# Allegro board moto_io.brd
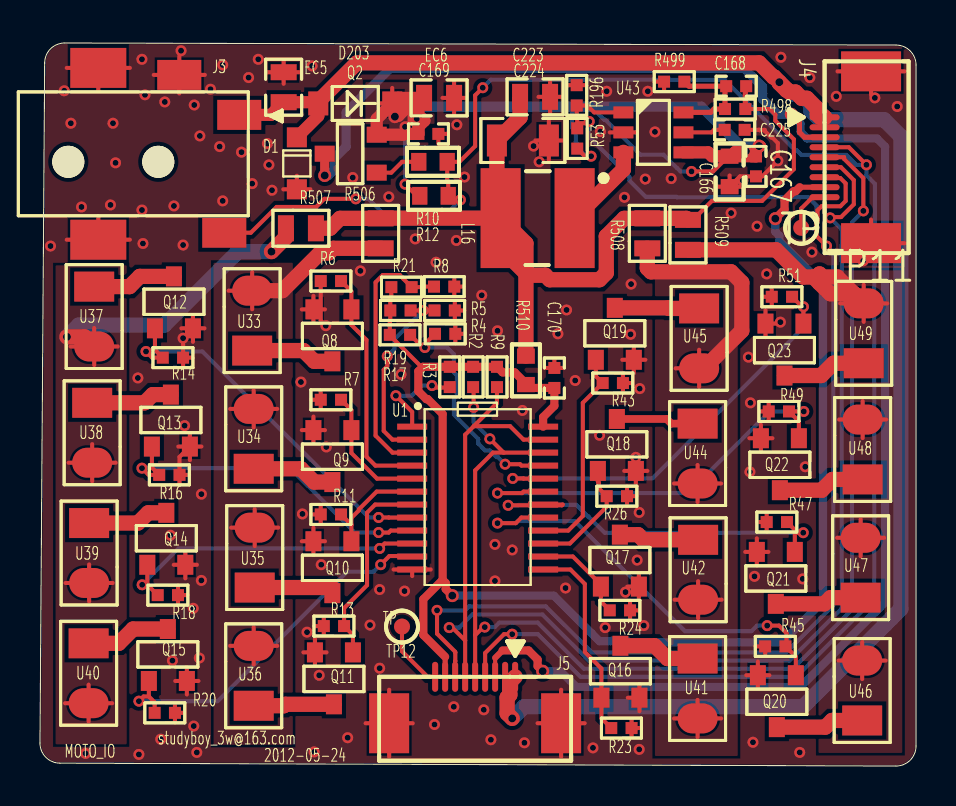
[diagram p0: board, top side]
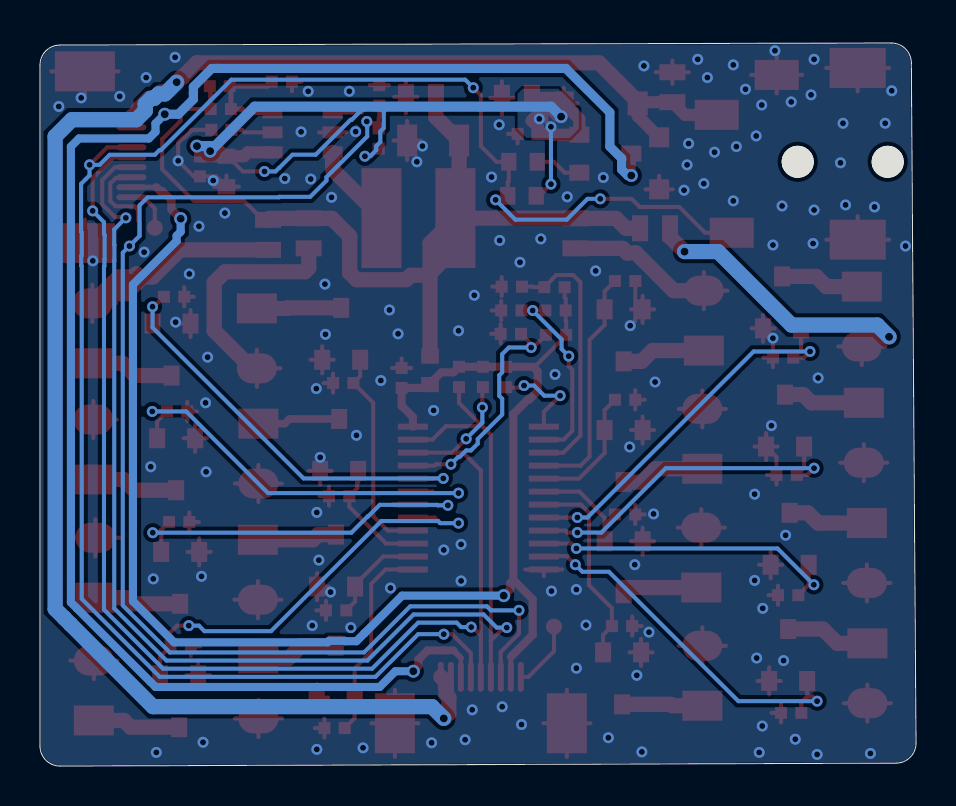
[diagram p1: board, bottom side, seen from below]

Outline 43.81 x 36.2 mm; copper layers: TOP, BOTTOM. Coordinates in mm from the lower left corner of the outline.
Outline path: 0,1.15 0.23,35.2 arc(0.53,35.91) 1.24,36.2 42.81,36.09 arc(43.52,35.8) 43.81,35.09 43.81,1 arc(43.51,0.29) 42.8,0 1,0.15 arc(0.29,0.44) 0,1.15

## Placement (name value [footprint] x y rotation side)
C166  4.7uF  [C0603]  34.49 29.77 270 top
C167  1uF  [C0402]  35.81 30.02 270 top
C168  10pF/NC  [C0402]  34.82 34.03 180 top
C169  1uF  [C0402]  19.42 31.64 0 top
C170  1uF  [C0402]  25.72 19.43 90 top
C223  22uF  [C0805]  24.76 33.5 0 top
C224  47uF  [C1206]  24.15 31.31 0 top
C225  1uF/NC  [C0402]  34.74 31.85 180 top
D1  MM3Z7V5  [SOD323]  12.85 30.17 90 top
D203  IN5819  [SOD123]  15.77 33.17 0 top
EC5  10uF  [C0805]  12.19 33.98 90 top
EC6  10uF  [C0805]  19.96 33.45 0 top
J3  DC JACK-111  [DC-PJK-111]  1.42 30.25 0 top
J4  CON8  [FCC9-0R5MM]  39.24 30.48 270 top
J5  CON8  [FCC9-0R5MM]  21.76 4.47 180 top
L16  2.2uH  [L4D18]  24.89 27.43 270 top
Q2  IRLML6401  [SOT-23]  15.54 30.65 90 top
Q8  KDT1304  [SOT-23]  14.62 21.56 180 top
Q9  KDT1304  [SOT-23]  14.62 15.52 180 top
Q10  KDT1304  [SOT-23]  14.62 9.95 180 top
Q11  KDT1304  [SOT-23]  14.7 4.39 180 top
Q12  KDT1304  [SOT-23]  6.7 23.21 0 top
Q13  KDT1304  [SOT-23]  6.55 17.29 0 top
Q14  KDT1304  [SOT-23]  6.32 11.38 0 top
Q15  KDT1304  [SOT-23]  6.39 5.56 0 top
Q16  KDT1304  [SOT-23]  29.03 4.72 0 top
Q17  KDT1304  [SOT-23]  29 10.28 0 top
Q18  KDT1304  [SOT-23]  28.85 16.07 0 top
Q19  KDT1304  [SOT-23]  28.75 21.64 0 top
Q20  KDT1304  [SOT-23]  36.85 3.25 180 top
Q21  KDT1304  [SOT-23]  36.8 9.42 180 top
Q22  KDT1304  [SOT-23]  37 15.11 180 top
Q23  KDT1304  [SOT-23]  37.23 20.85 180 top
R2  4.7K  [R0402]  21.66 19.48 270 top
R3  4.7K  [R0402]  20.49 19.48 270 top
R4  4.7K  [R0402]  20.26 21.64 0 top
R5  4.7K  [R0402]  20.24 22.81 0 top
R6  4.7K  [R0402]  14.55 24.28 180 top
R7  4.7K  [R0402]  14.55 18.34 180 top
R8  4.7K  [R0402]  20.21 24 0 top
R9  4.7K  [R0402]  22.85 19.48 270 top
R10  4.7K  [R0603]  19.65 30.25 0 top
R11  4.7K  [R0402]  14.55 12.59 180 top
R12  510K  [R0603]  19.7 28.55 180 top
R13  4.7K  [R0402]  14.7 7.01 180 top
R14  4.7K  [R0402]  6.65 20.44 0 top
R16  4.7K  [R0402]  6.47 14.58 0 top
R17  4.7K/NC  [R0402]  18 21.59 180 top
R18  4.7K  [R0402]  6.39 8.56 0 top
R19  4.7K/NC  [R0402]  18.03 22.81 180 top
R20  4.7K  [R0402]  6.24 2.66 0 top
R21  4.7K/NC  [R0402]  18.08 23.97 180 top
R23  4.7K  [R0402]  29.08 1.9 0 top
R24  4.7K  [R0402]  29 7.79 0 top
R26  4.7K  [R0402]  28.85 13.51 0 top
R43  4.7K  [R0402]  28.64 19.17 0 top
R45  4.7K  [R0402]  36.77 5.99 180 top
R47  4.7K  [R0402]  36.85 12.21 180 top
R49  4.7K  [R0402]  36.95 17.75 180 top
R51  4.7K  [R0402]  37.1 23.49 180 top
R53  100R  [R0402]  26.87 31.42 90 top
R196  10K  [R0402]  26.84 33.58 90 top
R498  267K/1%  [R0402]  34.77 32.89 180 top
R499  59K/1%  [R0402]  31.72 34.26 180 top
R506  0R  [R0805]  17.04 26.67 270 top
R507  0R  [R0805]  13.05 26.92 180 top
R508  0R  [R0805]  30.37 26.67 270 top
R509  0R  [R0805]  32.4 26.59 270 top
R510  0R/NC  [R0603]  24.3 19.81 270 top
TP11  TP  [TP80]  38.07 26.95 0 top
TP12  TP  [TP80]  18.1 6.98 0 top
U1  PCA8575_1  [SSOP24]  18.61 16.99 0 top
U33  0  [CON2A]  10.61 22.3 270 top
U34  1  [CON2A]  10.69 16.38 270 top
U35  2  [CON2A]  10.74 10.44 270 top
U36  3  [CON2A]  10.69 4.52 270 top
U37  4  [CON2A]  2.71 22.5 90 top
U38  5  [CON2A]  2.61 16.68 90 top
U39  6  [CON2A]  2.46 10.66 90 top
U40  7  [CON2A]  2.43 4.64 90 top
U41  8  [CON2A]  32.89 3.88 90 top
U42  9  [CON2A]  32.91 9.83 90 top
U43  SY8009B  [SOT23-6]  30.68 31.72 180 top
U44  10  [CON2A]  32.89 15.64 90 top
U45  11  [CON2A]  32.96 21.41 90 top
U46  12  [CON2A]  41.12 3.78 270 top
U47  13  [CON2A]  41.04 9.93 270 top
U48  14  [CON2A]  41.14 15.85 270 top
U49  15  [CON2A]  41.19 21.66 270 top

## Library data of the parts
C166 C167 C169 C170 C223 C225 = CAP NP: tolerance: 10%
C168 = CAP NP: tolerance: 5%
C224 = CAP: tolerance: +80%-20%
D1 = DIODE BREAKDOWN
D203 = DIODE_SCHOTTKY
EC5 EC6 = CED-5-2_5
J3 = DC JACK_1
J4 J5 = CON8_1
L16 = INDUCTOR: tolerance: 10%
Q2 = PMOS
Q8-Q23 = NPN
R2-R9 R11 R13 R14 R16-R21 R23 R24 R26 R43 R45 R47 R49 R51 R53 R506-R510 = R: tolerance: 5%
R10 R12 = R-0603
R196 = R: tolerance: 10%
R498 R499 = R: tolerance: 1%
TP11 TP12 = T POINT R: User Part Number: partnum; Tolerance: RichardLC
U1 = PCA8575
U33-U42 U44-U49 = MOT_3
U43 = SY8009B

## Footprints (pads in the part's own frame, mm; a bottom-side part is the same pattern mirrored in y, then rotated)
C0402
  rect 0.6x0.6 smd: 1(-0.5,0) 2(0.5,0)
C0603
  rect 0.762x0.889 smd: 1(-0.762,0) 2(0.762,0)
C0805
  rect 0.8x1.3 smd: 1(-0.75,0) 2(0.75,0)
C1206
  rect 1x1.6 smd: 1(-1.299,0) 2(1.299,0)
CON2A
  oval 1.5x2 smd: 1(-1.499,0)
  rect 1.5x2 smd: 2(1.499,0)
DC-PJK-111
  round 1.6 hole 1.6 unplated: (0,0) (4.5,0)
  rect 2.2x1.5 smd: 1(8.55,2.35) 2(5.55,4.35) 3(7.8,-3.55)
  rect 2.8x2 smd: 4(1.5,4.7) 5(1.5,-3.9)
FCC9-0R5MM
  oval 0.3x1.5 smd: 1(-2,0) 2(-1.5,0) 3(-1,0) 4(-0.5,0) 5(0,0) 6(0.5,0) 7(1,0) 8(1.5,0) 9(2,0)
  rect 2x3 smd: 10(-4.3,2.325) 11(4.3,2.325)
L4D18
  rect 5x2 smd: 1(0,1.85) 2(0,-1.85)
R0402
  rect 0.6x0.6 smd: 1(-0.508,0) 2(0.508,0)
R0603
  rect 0.762x0.889 smd: 1(-0.712,0) 2(0.712,0)
R0805
  rect 0.8x1.3 smd: 1(-0.75,0) 2(0.75,0)
SOD123
  rect 1.001x1.199 smd: 1(-1.849,0) 2(1.849,0)
SOD323
  rect 1.001x1.001 smd: 1(-1.301,0) 2(1.301,0)
SOT23-6
  rect 1x0.6 smd: 1(1.501,-1.001) 2(1.501,0) 3(1.501,1.001) 4(-1.501,1.001) 5(-1.501,0) 6(-1.501,-1.001)
SOT-23
  rect 0.8x1 smd: 1(-0.95,-1.3) 2(0.95,-1.3) 3(0,1.3)
SSOP24
  rect 1.5x0.3 smd: 1(0,0) 2(0,-0.65) 3(0,-1.3) 4(0,-1.95) 5(0,-2.6) 6(0,-3.25) 7(0,-3.9) 8(0,-4.55) 9(0,-5.2) 10(0,-5.85) 11(0,-6.5) 12(0,-7.15) 13(6.55,-7.15) 14(6.55,-6.5) 15(6.55,-5.85) 16(6.55,-5.2) 17(6.55,-4.55) 18(6.55,-3.9) 19(6.55,-3.25) 20(6.55,-2.6) 21(6.55,-1.95) 22(6.55,-1.3) 23(6.55,-0.65) 24(6.55,0)
TP80
  round 0.8 smd: 1(0,0)

## Nets
DGND: C166.2 C167.2 C169.2 C170.2 C223.2 C224.2 C225.1 D1.1(ANODE) EC5.2 EC6.2 J3.2(3T) J3.4(HAND1) J3.5(HAND2) J4.10(G1) J4.11(G2) J5.10(G1) J5.11(G2) Q8.2(EMITTER) Q9.2(EMITTER) Q10.2(EMITTER) Q11.2(EMITTER) Q12.2(EMITTER) Q13.2(EMITTER) Q14.2(EMITTER) Q15.2(EMITTER) Q16.2(EMITTER) Q17.2(EMITTER) Q18.2(EMITTER) Q19.2(EMITTER) Q20.2(EMITTER) Q21.2(EMITTER) Q22.2(EMITTER) Q23.2(EMITTER) R4.2 R5.2 R6.2 R7.2 R8.2 R11.2 R13.2 R14.2 R16.2 R18.2 R20.2 R23.2 R24.2 R26.2 R43.2 R45.2 R47.2 R49.2 R51.2 R196.2 R499.2 U1.12(VSS) U43.2(GND)
VDD_IO_3V3: C170.1 J4.8 J5.8 R2.1 R3.1 R9.1 R17.2 R19.2 R21.2 R510.2 U1.24(VDD)
VDD_M: C166.1 C167.1 C169.1 D203.2 EC6.1 Q2.2(SOURCE) R12.2 R53.1 U43.4(IN)
VDD_MOTO: C168.1 C223.1 C224.1 L16.2 R498.1 R506.1 R507.1 R508.1 R509.1 R510.1
AD0: R4.1 R17.1 U1.21(AD0)
AD1: R5.1 R19.1 U1.2(AD1)
AD2: R8.1 R21.1 U1.3(AD2)
DC_DET: J3.3(2TS) J4.4 J5.4 R10.2 R12.1
DC_IN: D1.2(CATHODE) D203.1 EC5.1 J3.1(1S) J4.1 J4.2 J5.1 J5.2
DC_VCC: J4.3 J5.3 Q2.3(DRAIN)
I2C_P1_INT: R3.2 U1.1(INT#)
I2C_SCL: J4.5 J5.5 R2.2 U1.22(SCL)
I2C_SDA: J4.6 J5.6 R9.2 U1.23(SDA)
M_PWREN: J4.7 J5.7 R53.2 R196.1 U43.1(EN)
MN_1: Q8.3(COLLECTOR) U33.2(N)
MN_2: Q9.3(COLLECTOR) U34.2(N)
MN_3: Q10.3(COLLECTOR) U35.2(N)
MN_4: Q11.3(COLLECTOR) U36.2(N)
MN_5: Q12.3(COLLECTOR) U37.2(N)
MN_6: Q13.3(COLLECTOR) U38.2(N)
MN_7: Q14.3(COLLECTOR) U39.2(N)
MN_8: Q15.3(COLLECTOR) U40.2(N)
MN_9: Q16.3(COLLECTOR) U41.2(N)
MN_10: Q17.3(COLLECTOR) U42.2(N)
MN_11: Q18.3(COLLECTOR) U44.2(N)
MN_12: Q19.3(COLLECTOR) U45.2(N)
MN_13: Q20.3(COLLECTOR) U46.2(N)
MN_14: Q21.3(COLLECTOR) U47.2(N)
MN_15: Q22.3(COLLECTOR) U48.2(N)
MN_16: Q23.3(COLLECTOR) U49.2(N)
MP_1: R506.2 U33.1(P) U34.1(P) U35.1(P) U36.1(P)
MP_5: R507.2 U37.1(P) U38.1(P) U39.1(P) U40.1(P)
MP_10: R508.2 U41.1(P) U42.1(P) U44.1(P) U45.1(P)
MP_13: R509.2 U46.1(P) U47.1(P) U48.1(P) U49.1(P)
P1_00: Q8.1(BASE) R6.1 U1.4(P00)
P1_01: Q9.1(BASE) R7.1 U1.5(P01)
P1_02: Q10.1(BASE) R11.1 U1.6(P02)
P1_03: Q11.1(BASE) R13.1 U1.7(P03)
P1_04: Q12.1(BASE) R14.1 U1.8(P04)
P1_05: Q13.1(BASE) R16.1 U1.9(P05)
P1_06: Q14.1(BASE) R18.1 U1.10(P06)
P1_07: Q15.1(BASE) R20.1 U1.11(P07)
P1_10: Q16.1(BASE) R23.1 U1.13(P10)
P1_11: Q17.1(BASE) R24.1 U1.14(P11)
P1_12: Q18.1(BASE) R26.1 U1.15(P12)
P1_13: Q19.1(BASE) R43.1 U1.16(P13)
P1_14: Q20.1(BASE) R45.1 U1.17(P14)
P1_15: Q21.1(BASE) R47.1 U1.18(P15)
P1_16: Q22.1(BASE) R49.1 U1.19(P16)
P1_17: Q23.1(BASE) R51.1 U1.20(P17)
N377047: C168.2 R498.2 R499.1 U43.6(FB)
N377129: L16.1 U43.3(LX)
N377407: C225.2 U43.5(NC)
N15740445: Q2.1(GATE) R10.1
N15755558: J4.9 TP11.1(TP)
N15755562: J5.9 TP12.1(TP)

## Via types
v1: diameter 0.55, hole 0.3, TOP to BOTTOM, 163 vias
v2: diameter 0.65, hole 0.4, TOP to BOTTOM, 12 vias

## Routing (per net, layer and track width the routed paths; a pad name or vN(x,y) marks a point on that pad's centre or on a via; arc(x,y) is an arc through that point)
DGND: length 130.7
  TOP w0.203: 1.34,34.95 J3.4 ; J3.4 2.92,33.77 ; J3.4 4.49,34.95 ; U1.12 19.54,9.84 ; U1.12 18.61,9.51 ; U1.12 17.68,9.84 ; 14.19,6.53 R13.2 ; R13.2 14.19,7.48 ; R13.2 13.71,7.01 ; 29.22,14.77 Q18.2 ; Q18.2 v1(29.8,15.45) ; Q18.2 29.8,14.1 ; Q18.2 30.38,14.77 ; 13.67,22.18 Q8.2 ; Q8.2 13.67,23.54 ; Q8.2 13.1,22.86 ; Q8.2 14.25,22.86 ; 6.69,10.08 Q14.2 ; Q14.2 7.85,10.08 ; Q14.2 7.27,9.4 ; Q14.2 7.27,10.75 ; Q9.2 13.67,17.49 ; Q9.2 13.67,16.14 ; Q9.2 13.1,16.82 ; Q9.2 14.25,16.82 ; R4.2 20.77,22.12 ; R4.2 20.77,21.16 ; R4.2 21.25,21.64 ; 35.85,10.04 Q21.2 ; Q21.2 36.43,10.72 ; Q21.2 35.27,10.72 ; Q21.2 35.85,11.4 ; R26.2 29.83,13.51 ; R26.2 29.36,13.03 ; R26.2 29.36,13.99 ; 29.95,8.31 Q17.2 ; Q17.2 29.95,9.66 ; Q17.2 29.37,8.98 ; R18.2 7.38,8.56 ; R18.2 6.9,9.03 ; R18.2 6.9,8.08 ; 13.75,5.01 Q11.2 ; Q11.2 14.33,5.69 ; Q11.2 13.17,5.69 ; Q11.2 13.75,6.37 ; 14.04,12.12 R11.2 ; R11.2 14.04,13.07 ; R11.2 13.56,12.59 ; EC5.2 13.01,34.73 ; EC5.2 12.19,34.15 ; EC5.2 12.19,35.31 ; EC5.2 11.36,34.73 ; R51.2 36.59,23.97 ; R51.2 36.12,23.49 ; R51.2 36.59,23.01 ; 33.86,29 C166.2 ; C166.2 35.11,29 ; C166.2 35,29.52 C167.2 36.12,29.52 v1(36.9,30.3) 36.9,31.19 36.62,31.47 36.57,31.47 36.24,31.8 36.24,31.85 35.96,31.85 ; C166.2 34.49,29.56 ; 35.47,16.41 Q22.2 ; Q22.2 36.05,15.73 ; Q22.2 36.63,16.41 ; Q22.2 36.05,17.09 ; 12.17,28.87 D1.1 ; D1.1 13.52,28.87 ; D1.1 12.85,29.55 ; Q13.2 7.5,16.67 ; Q13.2 7.5,15.32 ; Q13.2 6.92,15.99 ; Q13.2 6.98,15.48 R16.2 ; Q13.2 8.07,15.99 ; 20.72,23.52 R8.2 ; R8.2 20.72,24.48 ; R8.2 21.2,24 ; R20.2 6.75,3.14 ; R20.2 7.23,2.66 ; R20.2 6.75,2.19 ; 20.13,33.45 EC6.2 ; EC6.2 20.71,32.62 ; EC6.2 21.29,33.45 ; EC6.2 20.71,34.28 ; 6.77,4.26 Q15.2 ; Q15.2 7.34,4.94 ; Q15.2 7.34,3.58 ; Q15.2 7.92,4.26 ; 29.4,3.42 Q16.2 ; Q16.2 29.98,2.74 ; Q16.2 29.98,4.1 ; R24.2 29.51,8.27 ; R24.2 29.99,7.79 ; R24.2 29.51,7.32 ; 25.51,32.67 C223.2 ; C223.2 26.09,33.5 ; C223.2 25.51,34.33 ; C223.2 24.93,33.5 ; 13.67,10.58 Q10.2 ; Q10.2 13.1,11.25 ; Q10.2 14.25,11.25 ; Q10.2 13.67,11.93 ; 36.34,11.74 R47.2 ; R47.2 36.34,12.69 ; R47.2 35.86,12.21 ; 29.58,1.42 R23.2 ; R23.2 29.58,2.38 ; R23.2 30.06,1.9 ; Q19.2 29.7,21.02 ; Q19.2 29.12,20.34 ; Q19.2 30.27,20.34 ; Q19.2 29.7,19.66 ; J3.5 2.92,27.53 ; J3.5 1.34,26.35 ; J3.5 4.49,26.35 ; J5.10 27.24,2.14 ; J5.10 26.06,3.82 ; J5.10 26.06,0.46 ; J5.10 24.88,2.14 ; 29.15,18.7 R43.2 ; R43.2 29.63,19.17 ; R43.2 29.15,19.65 ; 13.56,18.34 R7.2 ; R7.2 14.04,18.81 ; R7.2 14.04,17.86 ; 20.74,22.33 R5.2 ; R5.2 20.74,23.28 ; R5.2 21.22,22.81 ; 7.65,21.23 Q12.2 ; Q12.2 8.23,21.91 ; Q12.2 v1(7.16,21.42) R14.2 ; Q12.2 7.07,21.91 ; Q12.2 7.65,22.59 ; C224.2 25.45,32.29 ; C224.2 26.13,31.31 ; C224.2 24.77,31.31 ; C224.2 25.45,30.34 ; 35.98,31.82 35.96,31.85 ; 35.96,31.85 C225.1 ; J4.11 43.24,26.18 ; J4.11 41.17,25.78 v1(41.17,25.29) ; J4.11 41.56,27.35 ; 35.96,17.75 R49.2 ; R49.2 36.44,17.27 ; R49.2 36.44,18.23 ; R14.2 7.63,20.44 ; R14.2 7.16,19.97 ; C170.2 25.72,20.41 ; C170.2 25.25,19.93 ; C170.2 26.2,19.93 ; 35.9,3.87 Q20.2 ; Q20.2 36.48,4.55 ; Q20.2 35.32,4.55 ; Q20.2 35.9,5.23 ; R16.2 6.98,14.1 ; R16.2 7.46,14.58 ; Q23.2 36.28,22.83 ; Q23.2 36.86,22.15 ; Q23.2 36.28,21.47 ; 27.32,34.08 R196.2 26.36,34.08 ; 5.69,34.6 J3.2 ; J3.2 6.97,33.67 ; J3.2 8.24,34.6 ; J3.2 6.97,35.53 ; 28.5,31.72 U43.2 29.85,31.72 ; 30.73,34.26 R499.2 31.21,33.78 ; R6.2 14.04,22.3 v1(14.29,22.04) ; J5.11 18.64,2.14 ; J5.11 17.46,3.82 ; J5.11 17.46,0.46 ; J5.11 16.28,2.14 ; 41.56,33.6 J4.10 ; J4.10 39.88,34.78 ; J4.10 43.24,34.78 ; 19.92,31.17 C169.2 20.4,31.64 ; 35.79,5.99 R45.2 36.26,5.51
  vias: v1(0.53,26.03) v1(1.21,33.8) v1(1.54,32.18) v1(2.08,27.99) v1(2.28,0.63) v1(3.52,28.09) v1(3.65,32.18) v1(3.78,30.2) v1(4.9,19.43) v1(4.95,0.58) v1(5.1,35.38) v1(5.1,27.83) v1(5.15,26.16) v1(5.25,33.6) v1(6.04,1.34) v1(6.24,33.25) v1(6.52,11.55) v1(6.62,5.28) v1(6.7,28.04) v1(7.05,35.81) v1(7.16,26.08) v1(7.23,17.04) v1(7.71,33.09) v1(7.66,7.9) v1(7.69,2) v1(7.84,0.68) v1(7.99,31.54) v1(7.97,5.41) v1(8.07,13.61) v1(8.07,9.29) v1(8.53,33.88) v1(8.98,31.01) v1(9.14,35.1) v1(9.14,28.29) v1(10.08,30.73) v1(10.43,34.46) v1(10.61,29.16) v1(10.92,35.38) v1(11.37,31.16) v1(11.45,30.1) v1(11.6,28.83) v1(13.05,19.22) v1(13.12,12.62) v1(13.35,6.7) v1(13.61,35.05) v1(13.71,0.71) v1(13.96,4.54) v1(14.06,10.08) v1(14.32,15.97) v1(15.39,1.42) v1(15.64,29.46) v1(16.02,24.79) v1(16.5,7.06) v1(16.99,8.84) v1(16.99,4.9) v1(17.44,28.5) v1(18.05,19.61) v1(18.23,8.76) v1(18.76,26.39) v1(19.73,2.08) v1(19.81,25.22) v1(20.69,2.97) v1(20.82,26.31) v1(20.85,32.1) v1(21.23,29.49) v1(22.09,23.57) v1(22.19,2.82) v1(22.55,1.32) v1(22.75,11.1) v1(22.75,9.27) v1(22.88,21.79) v1(23.62,10.82) v1(24.12,17.8) v1(24.22,1.16) v1(24.68,31.04) v1(24.96,30.25) v1(25.9,21.64) v1(26.28,8.91) v1(26.33,22.83) v1(26.76,19.3) v1(27.65,0.91) v1(28.02,31.76) v1(27.98,16.56) v1(28.26,6.93) v1(28.34,33.78) v1(29.23,28.47) v1(29.28,8.71) v1(29.56,24.13) v1(29.53,21.61) v1(29.86,10.31) v1(29.99,18.89) v1(29.97,12.7) v1(29.97,0.83) v1(30.19,7.03) v1(30.27,29.38) v1(30.4,33.78) v1(30.75,31.75) v1(31.57,29.41) v1(34.56,27.68) v1(35.15,29.31) v1(35.43,20.47) v1(35.53,18.18) v1(35.5,14.73) v1(35.65,1.19) v1(35.73,9.5) v1(35.86,27.02) v1(36.34,24.63) v1(37.03,22.22) v1(37.05,35.48) v1(37.99,0.68) v1(38.14,9.37) v1(38.27,14.98) v1(38.5,34.46) v1(38.6,25.73) v1(39.82,33.52) v1(41.75,33.45) v1(42.87,33.02)
VDD_IO_3V3: length 75.9
  TOP w0.203: 39.03,28.98 J4.8 ; 19.14,19.99 19.07,19.99 17.49,21.56 R17.2 17.49,22.25 17.52,22.28 R19.2 17.52,23.39 17.57,23.45 R21.2
  TOP w0.254: 37.99,28.98 39.03,28.98 ; 20.26,5.47 J5.8
  TOP w0.406: 20.14,9.32 20.14,17.62 19.39,18.37 19.32,18.37 18.92,18.76 18.92,19.76 19.14,19.99 R3.1 R2.1 R9.1 23.13,19.71 23.74,19.71 24.3,19.15 R510.2 24.47,18.93 C170.1 25.72,18.03 25.16,17.47 U1.24 ; 20.14,9.32 19.17,8.35 19.17,6.56 20.26,5.47 ; 20.14,9.32 20.29,9.17 20.29,8.86 v2(20.62,8.53) ; v2(36.77,27.4) 37.24,27.87 37.24,28.32 37.69,28.77 37.79,28.77 37.99,28.98
  BOTTOM w0.406: v2(36.77,27.4) 36.77,26.75 36.98,26.54 36.98,26.29 39.16,24.1 39.16,8.25 37.1,6.19 29.42,6.19 29.35,6.27 28.57,6.27 28.55,6.25 27.98,6.25 27.58,6.65 27.58,6.65 25.7,8.53 v2(20.62,8.53)
VDD_M: length 56.7
  TOP w0.203: 17.62,32.39 D203.2 ; D203.2 16.94,33.17 ; D203.2 17.62,33.95 ; v1(32.58,29.77) 33.66,29.77 34.42,30.53 ; v1(27.56,30.53) 27.25,30.53 R53.1 ; R12.2 18.84,28.55 v1(18.26,29.13) ; v1(18.26,32) 18.48,32.23 18.48,32.73 18.92,33.16 ; 18.93,33.17 EC6.1
  TOP w0.508: v2(35.3,30.78) 34.74,30.78 C166.1 ; 18.89,33.45 17.95,32.51 v2(17.75,32.51) ; v2(35.96,31.04) 36.06,31.04 35.81,30.78 C167.1
  TOP w0.61: C167.1 35.8,30.53 C166.1 33.61,30.53 33.42,30.72 U43.4 ; D203.2 18.93,33.17 18.92,33.16 18.92,32.64 18.84,32.56 v1(18.84,32.4) 19.13,32.4 19.22,32.31 18.92,32.01 C169.1 18.19,31.64 18.15,31.6 Q2.2 16.84,32.39 D203.2 ; D203.2 17.89,33.45 EC6.1
  BOTTOM w0.203: v1(27.56,30.53) 27.3,30.53 26.99,30.83 26.99,31.04 26.79,31.24 26.79,31.76 26.62,31.94 26.62,32.75 26.96,33.09 27.44,33.09 27.68,32.85 27.71,32.85 27.8,32.76 27.81,32.76 28.21,32.35 28.27,32.35 30.02,30.6 31.18,30.6 31.85,29.94 31.86,29.94 32.03,29.77 v1(32.58,29.77) ; v1(18.26,29.13) v1(18.26,32)
  BOTTOM w0.508: 35.05,31.04 33.07,33.01 18.25,33.01 v2(17.75,32.51) ; 35.05,31.04 v2(35.3,30.78) ; 35.05,31.04 v2(35.96,31.04)
VDD_MOTO: length 49.6
  TOP w0.203: R509.1 32.65,27.34 33.61,28.29 36.11,28.29 37.7,29.88 37.7,31.38 36.77,32.31 36.77,32.61 36.49,32.89 R498.1
  TOP w0.254: R498.1 35.27,33.99 C168.1
  TOP w0.762: L16.2 23.04,25.93 24.39,24.57 25.27,24.57 25.49,24.34 27.98,24.34 28.32,24.69 28.32,26.52 29.21,27.42 R508.1 32.33,27.42 R509.1 ; L16.2 17.05,27.43 R506.1 15,27.42 14.51,26.92 R507.1 ; L16.2 22.85,27.61 C224.1 24.01,32.47 C223.1 ; L16.2 24.3,26.16 R510.1
AD0: length 12.3
  TOP w0.203: R17.1 19.14,20.95 v1(19.25,20.95) 19.25,21.13 R4.1 ; v1(23.26,15.11) 24.01,15.11 24.08,15.04 U1.21
  BOTTOM w0.203: v1(23.26,15.11) 22.9,15.47 22.83,15.47 22.49,15.8 22.26,15.8 21.92,16.14 21.92,16.37 20.69,17.59 20.69,18.38 20.84,18.53 20.84,19.56 20.69,19.71 20.69,20.62 20.36,20.95 v1(19.25,20.95)
AD1: length 9.6
  TOP w0.203: R19.1 v1(19.17,22.81) R5.1 ; U1.2 17.63,16.34 17.19,16.78 17.19,19.84 17.37,20.02 v1(17.37,20.52)
  BOTTOM w0.203: v1(17.37,20.52) 17.72,20.88 17.72,21.36 v1(19.17,22.81)
AD2: length 13.2
  TOP w0.203: U1.3 17.63,15.69 16.78,16.54 16.78,24.22 17.14,24.58 18,24.58 18.17,24.4 18.17,24.39 R21.1 19.15,23.97 19.17,24 R8.1
DC_DET: length 89.6
  TOP w0.203: v1(23.62,6.6) 23.2,6.6 22.26,5.66 J5.4 ; J4.4 40.45,30.98 v1(41.33,30.1) ; v1(21.02,28.34) 20.62,28.34 R12.1 20.42,29.22 20.36,29.27 R10.2 20.97,30.25 21.76,31.03 21.76,33.58 v1(22.14,33.96) ; J3.3 10.54,26.7 11.83,27.99 13.81,27.99 14.22,28.39 v1(15.79,28.39)
  BOTTOM w0.203: v1(21.02,28.34) 20.03,27.35 17.47,27.35 16.43,28.39 v1(15.79,28.39) ; v1(23.62,6.6) 24.9,6.6 27.03,4.47 37.82,4.47 41.72,8.37 41.72,25.02 41.75,25.05 41.75,25.53 41.72,25.56 41.72,26.72 41.75,26.76 41.75,29.14 41.33,29.57 v1(41.33,30.1) 40.82,30.1 40.32,30.6 38.07,30.6 37.83,30.83 37.76,30.83 34.24,34.36 22.54,34.36 v1(22.14,33.96)
DC_IN: length 91.5
  TOP w0.254: J4.2 39.24,32.47 ; J5.2 23.26,3.53 23.36,3.43
  TOP w0.61: J3.1 11.55,32.6 EC5.1 13.85,33.23 D203.1 13.92,32.54 D1.2
  TOP w0.762: 37.38,33.83 37.33,33.83 36.97,34.19 v2(36.97,34.23) ; 37.38,33.83 36.72,34.49 36.67,34.49 35.96,35.2 15.85,35.2 13.92,33.27 D203.1 ; 37.38,33.83 37.47,33.74 37.78,33.74 38.09,33.43 38.35,33.43 38.86,32.92 38.86,32.84 39.24,32.47 J4.1 39.01,32.48 38.86,32.63 ; J5.1 23.5,4.2 23.5,3.56 23.36,3.43 23.36,2.64 v2(23.62,2.38)
  BOTTOM w0.762: v2(36.97,34.23) 37.56,33.64 37.88,33.64 38.09,33.43 38.26,33.43 38.55,33.14 38.55,32.8 38.99,32.36 42.21,32.36 43.05,31.52 43.05,7.87 42.59,7.41 42.59,7.41 42.29,7.11 38.16,2.97 24.2,2.97 v2(23.62,2.38)
DC_VCC: length 83.5
  TOP w0.203: 22.76,5.42 J5.3
  TOP w0.254: v2(37.57,32.63) 37.98,32.22 37.98,31.73 38.23,31.48 J4.3
  TOP w0.305: 23.13,5.79 22.76,5.42
  TOP w0.406: v2(25.14,4.75) 24.89,5 24.89,5.33 24.43,5.79 23.64,5.79 23.13,5.79
  TOP w0.457: Q2.3 v2(14.24,29.56)
  BOTTOM w0.406: v2(25.14,4.75) 26.03,4.75 26.82,3.96 38.03,3.96 41.97,7.9 42.26,8.19 42.26,31.01 41.86,31.42 38.36,31.42 38.03,31.75 38.03,32.17 v2(37.57,32.63)
  BOTTOM w0.457: v2(37.57,32.63) 36.89,32.63 36.14,33.38 36.14,33.68 36.14,34 35.22,34.92 34.89,34.92 17.51,34.92 15.31,32.72 15.31,31.01 14.72,30.42 14.72,29.86 14.42,29.56 v2(14.24,29.56)
I2C_P1_INT: length 4.8
  TOP w0.203: U1.1 18.61,17.73 v1(17.8,18.54) ; R3.2 20.47,18.94 19.7,18.94 v1(19.6,19.05)
  BOTTOM w0.203: v1(17.8,18.54) 18.59,18.54 19.1,19.05 v1(19.6,19.05)
I2C_SCL: length 63.6
  TOP w0.203: R2.2 21.68,18.94 v1(21.68,17.95) ; 23.19,15.69 U1.22 ; 23.19,15.69 22.65,15.69 21.76,14.8 21.76,6.55 ; 23.19,15.69 v1(22.5,16.38) ; 21.76,6.55 22.17,6.96 v1(22.24,6.96) ; 21.76,6.55 J5.5 ; v1(41.17,27.79) 41.17,29.43 40.21,30.39 40.21,30.48 J4.5
  BOTTOM w0.203: v1(41.17,27.79) 40.61,27.22 40.61,26.62 40.57,26.59 40.57,25.37 40.59,25.36 40.59,25.03 40.61,25.01 40.61,7.83 37.65,4.87 27.2,4.87 24.89,7.18 22.97,7.18 22.75,6.96 v1(22.24,6.96) ; v1(22.5,16.38) 21.68,17.19 v1(21.68,17.95)
I2C_SDA: length 66.1
  TOP w0.203: v1(20.47,6.93) 20.62,6.93 21.26,6.29 ; 21.69,17.01 22.85,18.17 R9.2 ; 21.69,17.01 23.51,17.01 24.18,16.34 U1.23 ; 21.69,17.01 21.26,16.58 21.26,6.29 ; v1(39.51,27.44) 39.55,27.48 40.06,27.48 40.7,28.12 40.7,29.33 40.05,29.98 J4.6 ; 21.26,6.29 J5.6
  BOTTOM w0.203: v1(20.47,6.93) 20.97,6.93 21.63,7.59 25.13,7.59 27.43,5.28 37.48,5.28 40.1,7.89 40.1,25.28 40.09,25.28 40.09,26.1 40.1,26.11 40.1,26.86 v1(39.51,27.44)
M_PWREN: length 69.5
  TOP w0.203: J4.7 39.29,29.48 39.33,29.43 40.02,29.43 40.29,29.16 40.29,28.29 40.02,28.02 39.09,28.02 38.88,27.82 38.88,27.29 38.83,27.23 38.83,26.54 v1(39.33,26.03) ; v1(27.47,32.27) 27.38,32.18 26.87,32.18 ; 26.87,32.18 26.87,32.45 26.84,32.48 R196.1 27.37,33.07 27.71,32.72 U43.1 ; 26.87,32.18 R53.2 ; v1(19.86,7.79) 19.86,6.63 20.76,5.72 20.76,5.69 20.77,5.68 20.77,5.26 20.76,5.25 J5.7
  BOTTOM w0.203: v1(19.86,7.79) 21.26,7.79 21.46,7.99 25.3,7.99 27.6,5.69 37.31,5.69 39.67,8.04 39.67,25.7 v1(39.33,26.03) 38.83,26.54 38.83,28.06 38.42,28.47 31.86,28.47 31.83,28.5 30.3,28.5 29.48,29.31 29.48,29.48 27.44,31.52 27.44,32 27.47,32.02 v1(27.47,32.27)
MN_1: length 4.2
  TOP w0.762: U33.2 13.18,20.8 13.72,20.26 Q8.3
MN_2: length 4.2
  TOP w0.762: U34.2 13.05,14.88 13.72,14.22 Q9.3
MN_3: length 4.1
  TOP w0.762: U35.2 14.59,8.94 14.62,8.9 Q10.3
MN_4: length 4
  TOP w0.762: Q11.3 12.27,3.09 12.19,3.02 U36.2
MN_5: length 4.2
  TOP w0.762: Q12.3 4.99,24.51 4.48,24 U37.2
MN_6: length 4.1
  TOP w0.762: U38.2 5.23,18.18 5.64,18.59 Q13.3
MN_7: length 4.1
  TOP w0.762: Q14.3 5.41,12.68 4.9,12.16 U39.2
MN_8: length 4.3
  TOP w0.762: U40.2 3.94,6.14 4.65,6.86 Q15.3
MN_9: length 4.1
  TOP w0.762: U41.2 31.38,5.38 30.74,6.02 Q16.3
MN_10: length 4
  TOP w0.762: Q17.3 29.91,11.58 30.17,11.33 U42.2
MN_11: length 4.1
  TOP w0.381: Q18.3 31.34,17.37 31.57,17.14 U44.2
MN_12: length 4.2
  TOP w0.762: Q19.3 31.42,22.94 31.45,22.91 U45.2
MN_13: length 4.4
  TOP w0.762: U46.2 39.61,2.28 39.27,1.95 Q20.3
MN_14: length 4.4
  TOP w0.762: Q21.3 39.22,8.12 39.53,8.43 U47.2
MN_15: length 4.4
  TOP w0.762: Q22.3 39.1,13.81 39.63,14.35 U48.2
MN_16: length 4.2
  TOP w0.762: Q23.3 39.07,19.55 39.68,20.16 U49.2
MP_1: length 23
  TOP w0.203: 9.51,6.02 U36.1 ; U36.1 10.69,5.09 ; U36.1 11.86,6.02 ; U36.1 10.69,6.94 ; U33.1 10.61,24.72 ; U33.1 9.43,23.8 ; U33.1 10.61,22.87 ; U34.1 11.86,17.88 ; U34.1 9.51,17.88 ; U34.1 10.69,16.95 ; U34.1 10.69,18.81 ; U35.1 10.74,12.86 ; U35.1 9.56,11.93 ; U35.1 10.74,11.01 ; U35.1 11.92,11.93
  TOP w0.762: U33.1 12.12,23.8 14.01,25.69 14.44,25.69 14.67,25.92 R506.2
MP_5: length 31.9
  TOP w0.203: 2.43,2.22 U40.1 ; U40.1 3.61,3.15 ; U40.1 2.43,4.07 ; U40.1 1.25,3.15 ; 2.46,8.24 U39.1 ; U39.1 3.63,9.17 ; U39.1 1.28,9.17 ; U39.1 2.46,10.09 ; 2.61,14.26 U38.1 ; U38.1 3.79,15.19 ; U38.1 1.43,15.19 ; U38.1 2.61,16.11 ; U37.1 3.89,21 ; U37.1 2.71,21.93 ; U37.1 2.71,20.07 ; U37.1 1.53,21
  TOP w0.762: U37.1 2.23,21.48 v2(1.35,21.48) ; v2(11.58,25.75) 12.3,26.48 R507.2
  BOTTOM w0.762: v2(11.58,25.75) 9.9,25.75 6.22,22.07 1.94,22.07 v2(1.35,21.48)
MP_10: length 27
  TOP w0.203: 32.89,13.22 U44.1 ; U44.1 31.71,14.14 ; U44.1 32.89,15.07 ; U44.1 34.06,14.14 ; 31.73,8.33 U42.1 ; U42.1 32.91,9.26 ; U42.1 34.09,8.33 ; U42.1 32.91,7.4 ; U45.1 32.96,20.84 ; U45.1 32.96,18.98 ; U45.1 31.78,19.91 ; 32.89,1.46 U41.1 ; U41.1 34.06,2.38 ; U41.1 31.71,2.38 ; U41.1 32.89,3.31
  TOP w0.762: R508.2 30.37,24.92 30.55,24.74 34.56,24.74 35.1,24.2 35.1,21.79 33.21,19.91 U45.1
MP_13: length 29.8
  TOP w0.203: U48.1 42.32,17.35 ; U48.1 41.14,18.27 ; U48.1 39.96,17.35 ; U48.1 41.14,16.42 ; 41.04,10.5 U47.1 ; U47.1 41.04,12.35 ; U47.1 39.86,11.43 ; U47.1 42.22,11.43 ; U49.1 41.19,24.09 ; U49.1 42.37,23.16 ; U49.1 40.01,23.16 ; U49.1 41.19,22.23 ; 39.94,5.28 U46.1 ; U46.1 41.12,4.35 ; U46.1 41.12,6.21 ; U46.1 42.29,5.28
  TOP w0.762: 38.98,24.18 39.52,23.64 40.71,23.64 ; 38.98,24.18 38.68,24.48 ; 38.98,24.18 38.98,24.63 38.83,24.48 ; 38.68,24.48 38.17,24.48 36.81,25.84 R509.2 ; 38.68,24.48 38.83,24.48 ; 38.83,24.48 39.87,24.48 40.71,23.64 ; 40.71,23.64 U49.1
P1_00: length 11.8
  TOP w0.203: R6.1 15.57,23.76 Q8.1 15.57,22.08 15.89,21.76 16.33,21.33 16.33,15.49 16.78,15.04 U1.4
P1_01: length 6.4
  TOP w0.203: U1.5 16.85,14.39 15.57,15.67 Q9.1 15.57,17.82 R7.1
P1_02: length 5.5
  TOP w0.203: 15.57,12.08 R11.1 ; 15.57,12.08 15.57,12.43 15.95,12.8 15.95,12.85 16.84,13.74 U1.6 ; 15.57,12.08 Q10.1
P1_03: length 10.1
  TOP w0.203: U1.7 16.76,13.09 16.36,12.68 16.36,9.05 15.21,7.91 R13.1 15.65,6.56 Q11.1
P1_04: length 19.4
  TOP w0.203: Q12.1 5.75,20.83 R14.1 5.61,20.44 v1(5.3,20.75) ; U1.8 17.44,12.44 17.44,12.44 v1(16.93,12.44)
  BOTTOM w0.203: v1(5.3,20.75) 8.12,20.75 16.43,12.44 v1(16.93,12.44)
P1_05: length 17.5
  TOP w0.203: U1.9 17.54,11.79 17.44,11.69 v1(16.93,11.69) ; Q13.1 5.6,14.94 R16.1 5.43,14.58 v1(5.1,14.91)
  BOTTOM w0.203: v1(16.93,11.69) 15.73,11.69 12.51,14.91 v1(5.1,14.91)
P1_06: length 16.4
  TOP w0.203: v1(16.99,10.89) 17.23,11.14 U1.10 ; 5.37,9.07 v1(5.11,9.07) ; 5.37,9.07 R18.1 ; 5.37,9.07 Q14.1
  BOTTOM w0.203: v1(16.99,10.89) 6.93,10.89 v1(5.11,9.07)
P1_07: length 19
  TOP w0.203: 5.44,3.48 Q15.1 ; 5.44,3.48 5.18,3.48 v1(4.95,3.25) ; 5.44,3.48 5.73,3.19 R20.1 ; U1.11 18.59,10.51 17.47,10.51 v1(17.04,10.08)
  BOTTOM w0.203: v1(4.95,3.25) 8.88,3.25 15.36,9.72 16.68,9.72 v1(17.04,10.08)
P1_10: length 10.1
  TOP w0.203: R23.1 28.08,2.39 Q16.1 28.08,4.88 27.25,5.71 27.25,9.12 26.52,9.84 U1.13
P1_11: length 4.9
  TOP w0.203: R24.1 28.05,8.24 Q17.1 28.05,9.08 26.64,10.49 U1.14
P1_12: length 5.9
  TOP w0.203: U1.15 26.5,11.14 28.34,12.98 R26.1 27.95,13.9 27.95,14.15 27.93,14.17 27.93,14.23 27.9,14.26 Q18.1
P1_13: length 10.7
  TOP w0.203: U1.16 26.42,11.79 27.15,12.52 27.15,18.18 R43.1 27.8,19.51 Q19.1
P1_14: length 21.8
  TOP w0.203: U1.17 24.07,12.44 23.79,12.16 v1(22.88,12.16) ; 37.33,5.94 37.8,5.47 Q20.1 ; 37.33,5.94 37.33,6.65 36.95,7.03 v1(36.37,7.03) ; 37.33,5.94 R45.1
  BOTTOM w0.203: v1(22.88,12.16) 23.79,12.16 23.9,12.26 26.74,12.26 32.25,6.75 35.59,6.75 35.86,7.03 v1(36.37,7.03)
P1_15: length 21.2
  TOP w0.203: Q21.1 37.75,11.82 ; 37.75,11.82 37.89,11.68 v1(38.17,11.68) ; 37.75,11.82 R47.1 ; U1.18 26.14,13.09 26.1,13.05 v1(23.41,13.05)
  BOTTOM w0.203: v1(38.17,11.68) 28.24,11.68 27.43,12.49 27.4,12.49 26.82,13.08 23.94,13.08 23.92,13.05 v1(23.41,13.05)
P1_16: length 21.6
  TOP w0.203: Q22.1 37.95,17.26 R49.1 v1(38.19,17.75) ; U1.19 24.18,13.74 24.11,13.66 v1(22.88,13.66)
  BOTTOM w0.203: v1(22.88,13.66) 32.41,13.66 36.49,17.75 v1(38.19,17.75)
P1_17: length 21.9
  TOP w0.203: R51.1 38.18,22.92 ; 38.18,22.92 v1(38.18,22.99) ; 38.18,22.92 Q23.1 ; U1.20 24.18,14.39 24.17,14.4 v1(23.64,14.4)
  BOTTOM w0.203: v1(23.64,14.4) 30.63,14.4 38.18,21.95 v1(38.18,22.99)
N377047: length 5.5
  TOP w0.254: R499.1 32.45,34.03 C168.2 34.26,33.97 R498.2 33.7,32.89 33.54,32.72 U43.6
N377129: length 4.3
  TOP w0.762: L16.1 29.18,29.87 U43.3
N377407: length 2.1
  TOP w0.203: C225.2 33.71,31.85 33.58,31.72 U43.5
N15740445: length 2.3
  TOP w0.203: R10.1 18.11,30.25 17.57,29.7 Q2.1
N15755558: length 2.4
  TOP w0.203: TP11.1 38.07,27.91 38.64,28.48 J4.9
N15755562: length 3.4
  TOP w0.203: TP12.1 18.1,5.75 19.38,4.47 J5.9

## Copper pours and planes (outline as drawn; the poured copper is in the pictures)
DGND on TOP: 43.76,1 43.48,0.33 42.8,0.05 1,0.2 0.32,0.48 0.05,1.15 0.28,35.2 0.57,35.87 1.24,36.15 42.81,36.04 43.48,35.76 43.76,35.09 ; 12 cut-outs
DGND on BOTTOM: 43.76,1 43.48,0.33 42.8,0.05 1,0.2 0.32,0.48 0.05,1.15 0.28,35.2 0.57,35.87 1.24,36.15 42.81,36.04 43.48,35.76 43.76,35.09 ; 3 cut-outs
VDD_M on TOP: 16.27,34.24 16.27,31.09 19.73,31.09 19.73,34.24
VDD_M on BOTTOM: 17.82,33.83 17.8,33.83 16.86,32.89 16.86,31.9 17.32,31.44 19.47,31.44 19.93,31.9 19.93,33.65 19.68,33.91 17.87,33.91 17.82,33.85
MP_1 on TOP: 8.68,25.19 8.68,1.06 12.64,1.06 12.64,25.19
MP_5 on TOP: 0.78,25.07 0.78,1.09 4.34,1.09 4.34,25.07
MP_10 on TOP: 30.75,24.79 30.75,0.5 34.89,0.5 34.89,24.79
MP_13 on TOP: 38.93,24.81 38.93,0.66 43.12,0.66 43.12,24.81

## Text on the board
Ref Des/Silkscreen Top: MOTO_IO | studyboy_3w@163.com | 2012-05-24
NCLEGEND-1-2: FIGURE | SIZE | 11.811 | 15.748 | 62.988 | DRILL CHART: TOP to BOTTOM | ALL UNITS ARE IN MILS | PLATED | NON-PLATED | QTY | 163 | 12 | 2
